# Altium PCB Bottom MEA (Inverted Microscope).PcbDoc
Units mm, origin at the board's own origin, x right, y up, seen from the top; angles counter-clockwise.
Board outline 50 x 50 mm, 2 copper layers (Top Signal, Ground Pour); 24 components, 81 nets, 231 pads, 118 vias.
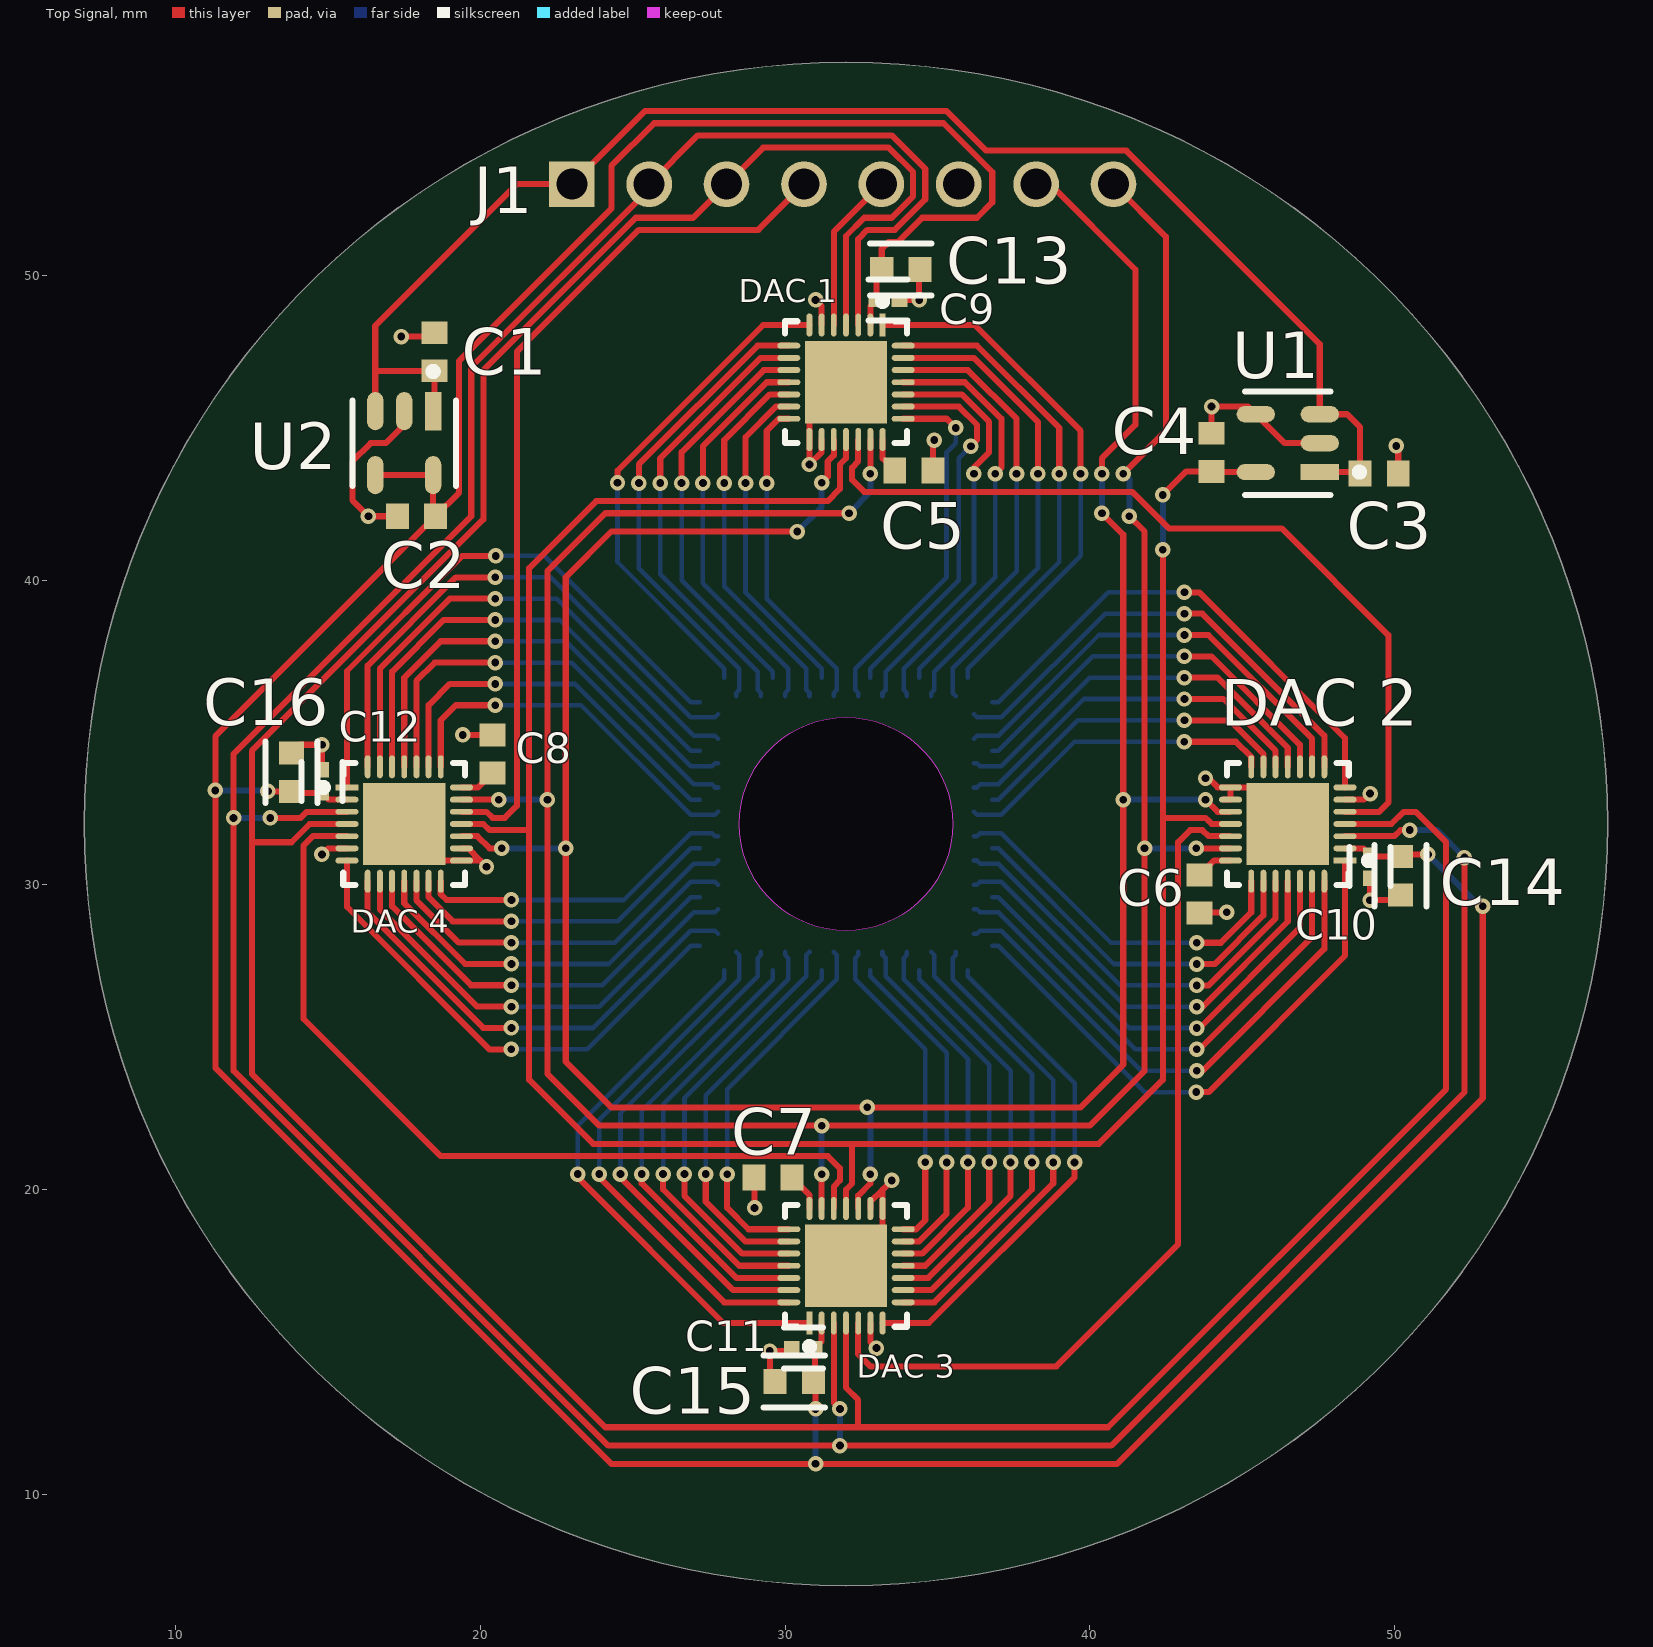
[diagram p0: Top Signal view]
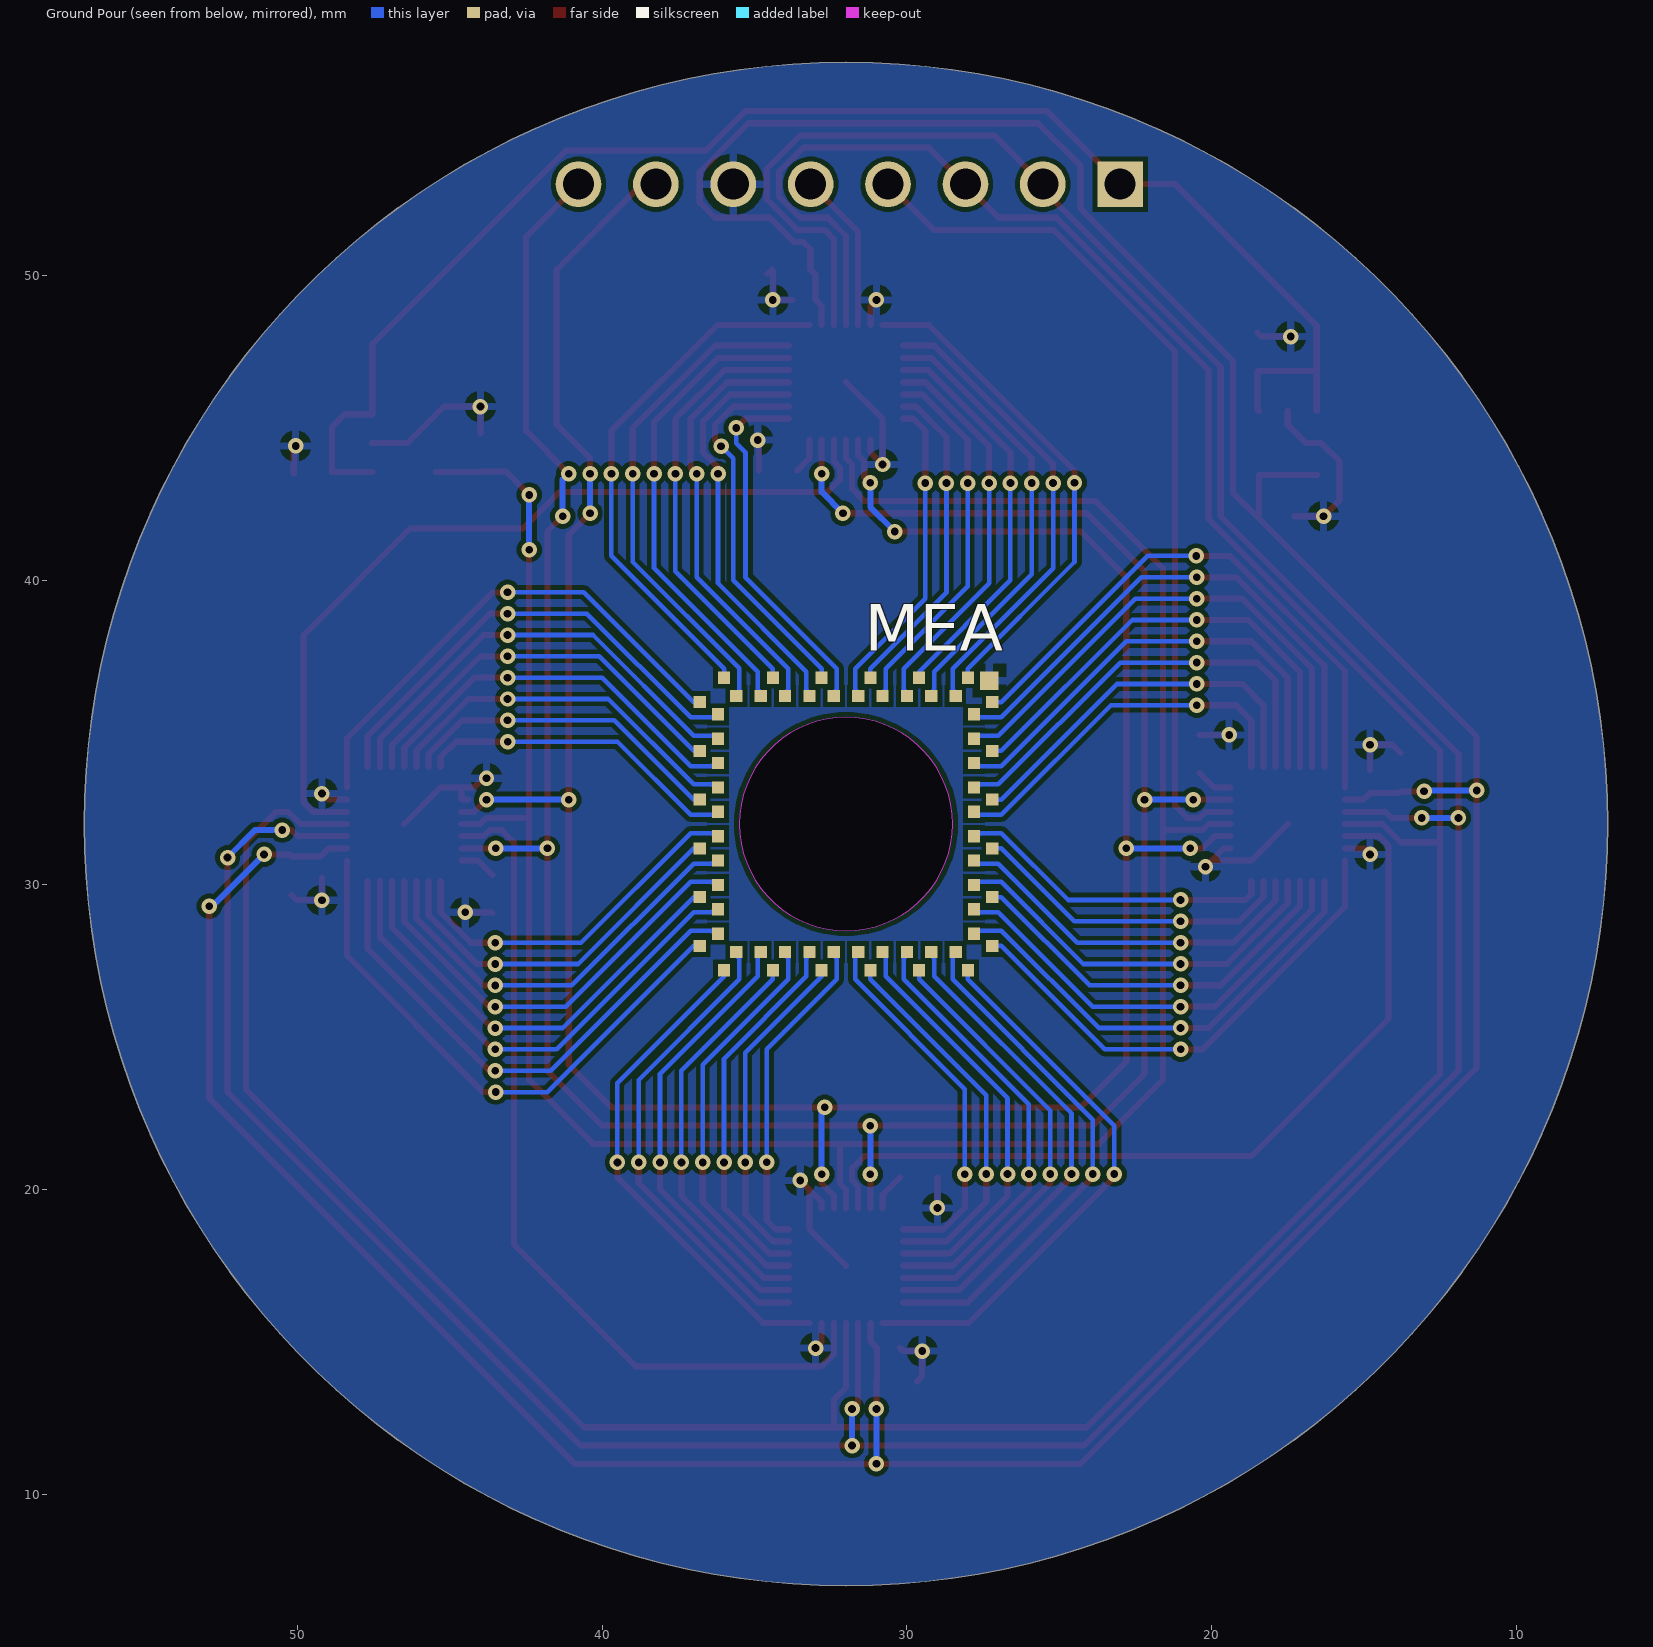
[diagram p1: Ground Pour view, seen from below]
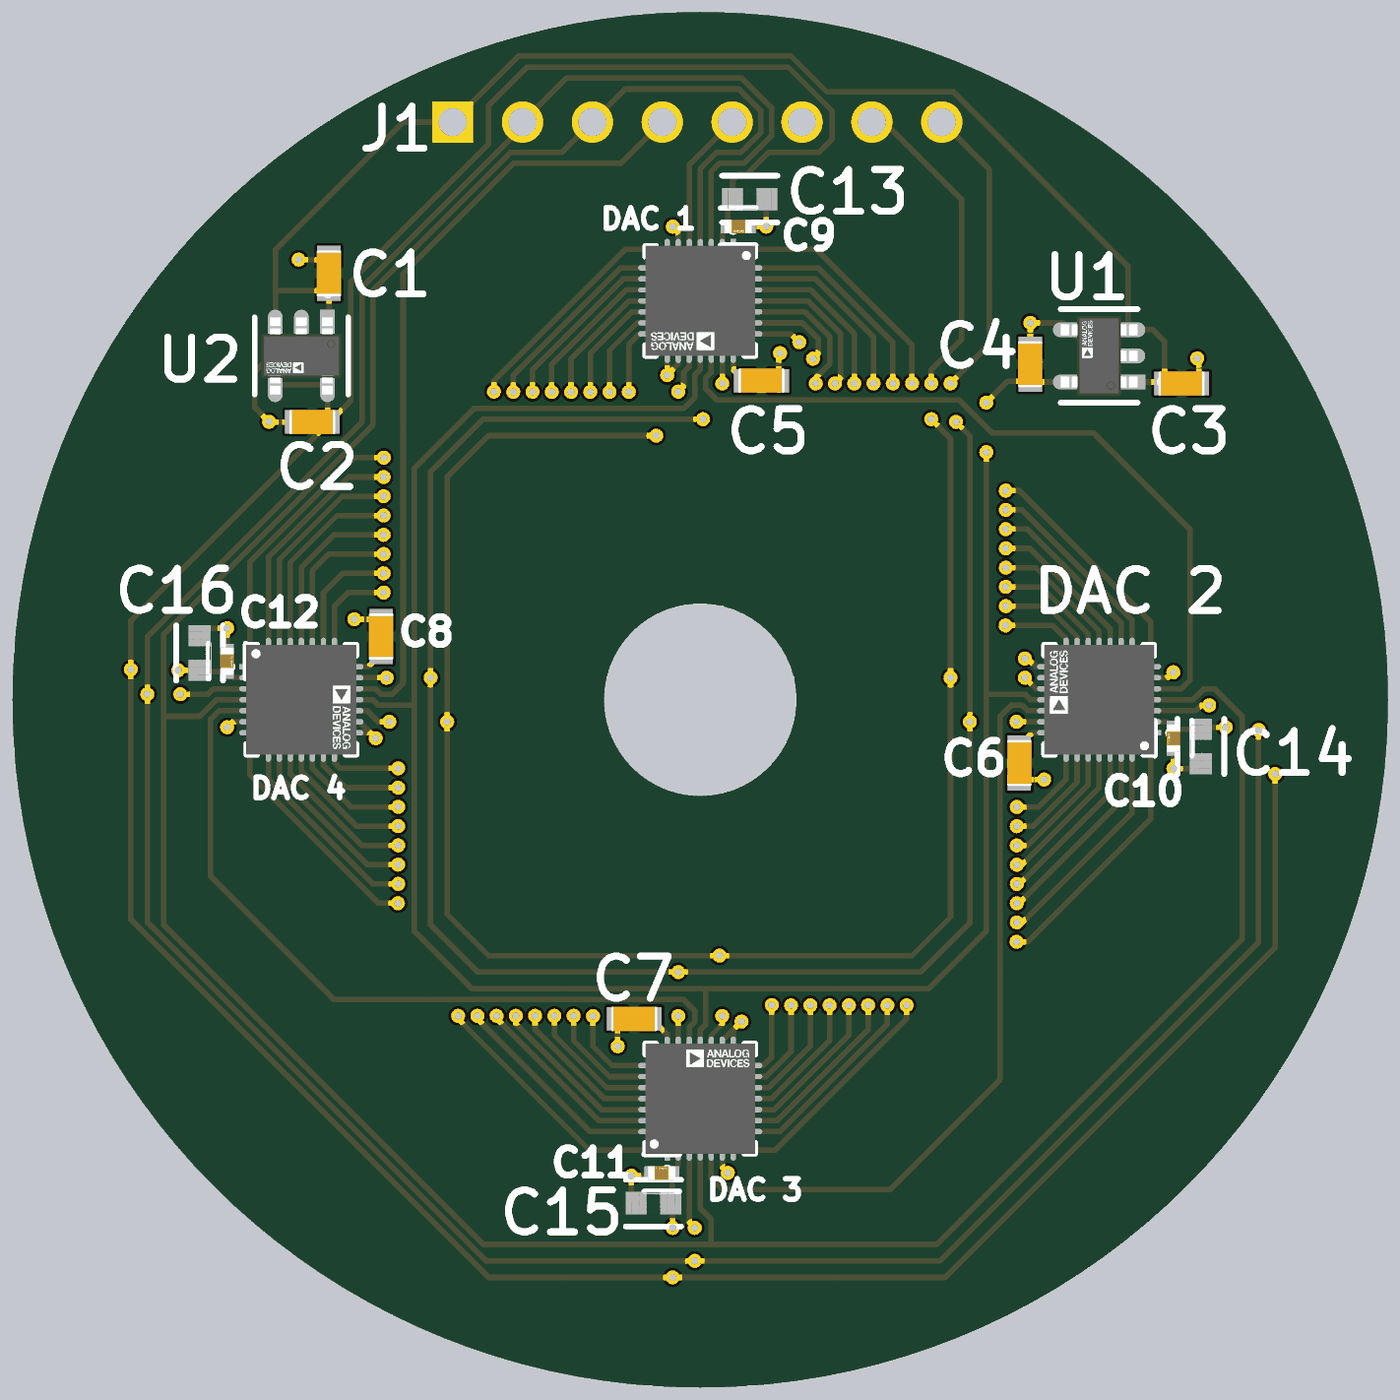
[diagram p2: 3D render of the assembled board from above, using the file's embedded part models]

## Layer stack, top to bottom
Top Solder: solder mask 0.0102, Solder Resist, Dk 3.5
Top Signal: signal copper 0.0356
Dielectric 1: dielectric 0.32, FR-4, Dk 4.8
Ground Pour: signal copper 0.0356
Bottom Solder: solder mask 0.0102, Solder Resist, Dk 3.5

## Board outline
32,7 cw(c32,32) 7,32 cw(c32,32) 32,57 cw(c32,32) 57,32 cw(c32,32)
cut-out: 32,28.5 cw(c32,32) 28.5,32 cw(c32,32) 32,35.5 cw(c32,32) 35.5,32 cw(c32,32)

## Design rules (kind name [scope] priority, off if disabled: settings)
Clearance [All] p1: gap=0.152 ignorepadtopadclearanceinfootprint=TRUE except(0: Arc-Hole Track-Hole SMDPad-Hole THPad-Hole Via-Hole Fill-Hole Poly-Hole Region-Hole Text-Hole)
PlaneConnect [All] p1: planeconnectstyle=Direct reliefexpansion=0.508 reliefentries=4 reliefconductorwidth=0.254 reliefairgap=0.254
PolygonConnect [All] p1: connectstyle=Relief reliefconductorwidth=0.254 reliefentries=4 polygonreliefangle="90 Angle" airgapwidth=0.254
RoutingVias [All] p1: holewidth=0.254 width=0.508 viastyle="Through Hole" minholewidth=0.254 minwidth=0.508 maxholewidth=0.254 maxwidth=0.508
SolderMaskExpansion [All] p1: expansion=0.102 istentingtop=FALSE
Width [All] p1: maxlimit=0.2 minlimit=0.152 preferedwidth=0.2 bottomlayer_prefwidth=0.152 minimp=50.000000 maximp=50.000000 favimp=50.000000
29 further rules are at their usual default settings.

## Components (designator, comment, footprint, x,y, rotation, side; value= is the part's Value field where it differs from the comment)
C1 "2.2 µF" CAPC1608X90X30LL10T20 18.5,47.5 r270 top
C2 "2.2 µF" CAPC1608X90X30LL10T20 17.9,42.1 r0 top
C3 "2.2 µF" CAPC1608X90X30LL10T20 49.5,43.5 r180 top locked
C4 "2.2 µF" CAPC1608X90X30LL10T20 44,44.2 r270 top
C5 "2.2 µF" CAPC1608X90X30LL10T20 34.225,43.6 r0 top locked
C6 "2.2 µF" CAPC1608X90X30LL10T20 43.6,29.7 r90 top locked
C7 "2.2 µF" CAPC1608X90X30LL10T20 29.6,20.4 r0 top locked
C8 "2.2 µF" CAPC1608X90X30LL10T20 20.4,34.3 r270 top
C9 "0.1 µF" FP-CL278-IPC_C 33.379,49.2 r0 top locked
C10 "0.1 µF" FP-CL278-IPC_C 49.2,30.6 r270 top locked
C11 "0.1 µF" FP-CL278-IPC_C 30.6,14.8 r180 top locked
C12 "0.1 µF" FP-CL278-IPC_C 14.8,33.4 r90 top locked
C13 "10 µF" FP-CL10-IPC_C 33.8,50.2 r0 top locked
C14 "10 µF" FP-CL10-IPC_C 50.2,30.3 r270 top locked
C15 "10 µF" FP-CL10-IPC_C 30.3,13.7 r180 top locked
C16 "10 µF" FP-CL10-IPC_C 13.8,33.7 r90 top locked
"DAC 1" "AD5674RBCPZ-1" FP-CP-28-9-IPC_C 32,46.5 r270 top locked
"DAC 2" "AD5674RBCPZ-1" FP-CP-28-9-IPC_C 46.5,32 r180 top locked
"DAC 3" "AD5674RBCPZ-1" FP-CP-28-9-IPC_C 32,17.5 r90 top locked
"DAC 4" "AD5674RBCPZ-1" FP-CP-28-9-IPC_C 17.5,32 r0 top locked
J1 "SPI Bus Connector" "SPI Bus Connector" 23,53 r90 top
MEA "64 Electrode Wafer" "64 Electrode Wafer Footprint" 27,27 r0 bottom locked
U1 "ADP160AUJZ-1.8-R7" FP-UJ-5-IPC_C 46.5,44.5 r180 top locked
U2 "ADP7118WAUJZ-3.3-R7" FP-UJ-5-IPC_C 17.5,44.5 r270 top locked

## Footprints (in the part's own frame and the unit in brackets; to place one, negate y for a bottom-side part, rotate by r counter-clockwise, add the part's x,y. Pads: shape width x height; smd on the part's side, far side on the other; paste and mask are expansions set on the pad)
"64 Electrode Wafer Footprint" [mm]
  rect 0.4x0.4 smd mask+0: 1(1,-9.8) 2(1.4,-9.2) 3(2.2,-9.2) 4(2.6,-9.8) 5(3,-9.2) 6(3.8,-9.2) 7(4.2,-9.8) 8(4.6,-9.2) 9(5.4,-9.2) 10(5.8,-9.8) 11(6.2,-9.2) 12(7,-9.2) 13(7.4,-9.8) 14(7.8,-9.2) 15(8.6,-9.2) 16(9,-9.8) 17(9.8,-9) 18(9.2,-8.6) 19(9.2,-7.8) 20(9.8,-7.4) 21(9.2,-7) 22(9.2,-6.2) 23(9.8,-5.8) 24(9.2,-5.4) 25(9.2,-4.6) 26(9.8,-4.2) 27(9.2,-3.8) 28(9.2,-3) 29(9.8,-2.6) 30(9.2,-2.2) 31(9.2,-1.4) 32(9.8,-1) 33(9,-0.2) 34(8.6,-0.8) 35(7.8,-0.8) 36(7.4,-0.2) 37(7,-0.8) 38(6.2,-0.8) 39(5.8,-0.2) 40(5.4,-0.8) 41(4.6,-0.8) 42(4.2,-0.2) 43(3.8,-0.8) 44(3,-0.8) 45(2.6,-0.2) 46(2.2,-0.8) 47(1.4,-0.8) 48(1,-0.2) 49(0.2,-1) 50(0.8,-1.4) 51(0.8,-2.2) 52(0.2,-2.6) 53(0.8,-3) 54(0.8,-3.8) 55(0.2,-4.2) 56(0.8,-4.6) 57(0.8,-5.4) 58(0.2,-5.8) 59(0.8,-6.2) 60(0.8,-7) 61(0.2,-7.4) 62(0.8,-7.8) 63(0.8,-8.6) 64(0.2,-9)
  rect 0.6x0.6 smd mask+0: 65(0.3,-9.7)
CAPC1608X90X30LL10T20 [mm] "Chip Capacitor, 2-Leads, Body 1.70x0.90mm, IPC High Density"
  rect 0.75x0.85 smd: 1(-0.625,0) 2(0.625,0)
  body extent -0.85,-0.45 0.85,0.45, height 0.9
FP-CL10-IPC_C [mm]
  rect 0.758x0.812 smd paste+0 mask+0: 1(-0.627,0) 2(0.627,0)
  silkscreen extent -1.01,-0.85 1.01,0.85, body extent -1.11,-0.55 1.11,0.55, height 0.25
FP-CL278-IPC_C [mm]
  rect 0.515x0.472 smd paste+0 mask+0: 1(-0.379,0) 2(0.379,0)
  silkscreen extent -0.64,-0.67 0.64,0.67, body extent -0.74,-0.38 0.74,0.38, height 0.25
FP-CP-28-9-IPC_C [mm]
  rect 0.756x0.192 smd paste+0 mask+0: 1(-1.878,1.2)
  rrect100% 0.756x0.192 smd paste+0 mask+0: 2(-1.878,0.8) 3(-1.878,0.4) 4(-1.878,0) 5(-1.878,-0.4) 6(-1.878,-0.8) 7(-1.878,-1.2) 15(1.878,-1.2) 16(1.878,-0.8) 17(1.878,-0.4) 18(1.878,0) 19(1.878,0.4) 20(1.878,0.8) 21(1.878,1.2)
  rrect100% 0.192x0.756 smd paste+0 mask+0: 8(-1.2,-1.878) 9(-0.8,-1.878) 10(-0.4,-1.878) 11(0,-1.878) 12(0.4,-1.878) 13(0.8,-1.878) 14(1.2,-1.878) 22(1.2,1.878) 23(0.8,1.878) 24(0.4,1.878) 25(0,1.878) 26(-0.4,1.878) 27(-0.8,1.878) 28(-1.2,1.878)
  rect 2.7x2.7 smd paste-1000 mask+0: 29(0,0)
  silkscreen extent -2.78,-2 2,2, body extent -2.36,-2.36 2.36,2.36, height 0.25
FP-UJ-5-IPC_C [mm]
  rect 1.254x0.532 smd paste+0 mask+0: 1(-1.05,0.95)
  rrect100% 1.254x0.532 smd paste+0 mask+0: 2(-1.05,0) 3(-1.05,-0.95) 4(1.05,-0.95) 5(1.05,0.95)
  silkscreen extent -2.48,-1.7 1.4,1.7, body extent -1.78,-1.55 1.78,1.55, height 0.25
"SPI Bus Connector" [mm]
  rect 1.5x1.5 hole 1.02 mask+0: 1(0,0)
  round 1.5 hole 1.02 mask+0: 2(0,-2.54) 3(0,-5.08) 4(0,-7.62) 5(0,-10.16) 6(0,-12.7) 7(0,-15.24) 8(0,-17.78)

## Part data
C1 C2 C3 C4 C5 C6 C7 C8: library part CMP-2000-06090-1, "Chip Capacitor, 2.2 uF, +/- 10%, 10 V, -55 to 85 degC, 0603 (1608 Metric), RoHS, Tape and Reel", Capacitance=4700000pF, Case Size/Dimension=0603, Dielectric=X5R, Manufacturer="Samsung Electro-Mechanics", Package Description="2-Pin Surface Mount Device, Body 1.60 x 0.80 mm", Rated Voltage=6.3V, Tolerance (%)=±10%, Datasheet URL=http://www.samsungsem.com/kr/support/product-search/mlcc/__icsFiles/afieldfile/2016/08/18/S_CL10A475KQ8NNNC.pdf, Datasheet Version=07/2016, Manufacturer URL=http://www.samsungsem.com/global/index.jsp, Mounting Technology=SurfaceMount, Package Reference=0603
C9 C10 C11 C12: library part CMP-13271-000728-1, "Cap Ceramic 100nF 25V X5R ±10% SMD 0402 +85°C Paper T/R", Capacitance=100nF, Case Code (Imperial)=0402, Case Code (Metric)=1005, Dielectric=X5R, Max Operating Temperature=85°C, Min Operating Temperature=-55°C, Package Quantity=1, Tolerance=10%, Voltage=25V, Case/Package=0402, Depth=0.5mm, Height=0.5mm, Lead Free="Lead Free", Length=1mm, Mount="Surface Mount", Packaging="Tape and Reel", Radiation Hardening=No, Thickness=0.022inch, Voltage Rating=25V, Voltage Rating (DC)=25V, Width=0.02inch
C13 C14 C15 C16: library part CMP-13271-001938-1, "Cap Ceramic 10uF 6.3V X5R ±20% Pad SMD 0603 +85°C T/R", Capacitance=10uF, Case Code (Imperial)=0603, Case Code (Metric)=1608, Dielectric=X5R, Max Operating Temperature=85°C, Min Operating Temperature=-55°C, Package Quantity=1, Tolerance=20%, Voltage=6.3V, Case/Package=0603, Contact Plating=Tin, Depth=0.8mm, Height=0.8mm, Length=1.6mm, Mount="Surface Mount", Packaging="Tape and Reel", Radiation Hardening=No, Thickness=0.035inch, Voltage Rating=6.3V, Width=0.031inch
"DAC 1" "DAC 2" "DAC 3" "DAC 4": library part CMP-09082-000013-1, "16-CH12-BITNANODAC+WITH2PPM/CREF", RoHS Compliant=Yes
J1: "8 pin connector for SPI interface and power from m", Part Number="SPI Bus Connector"
MEA: "64 channel transparent Microelectrode Array", Part Number="64 Electrode Wafer"
U1: library part CMP-09138-000088-1, "IC REG LINEAR 1.8V 150MA TSOT5", Case/Package=TSOT, Dropout Voltage=120mV, Max Input Voltage=5.5V, Max Operating Temperature=125°C, Max Output Current=150mA, Max Output Voltage=4.2V, Max Supply Current=42uA, Min Current Limit=220mA, Min Input Voltage=2.2V, Min Operating Temperature=-40°C, Min Output Voltage=1.2V, Nominal Output Voltage=1.8V, Output Voltage Accuracy=2%, Power Supply Rejection Ratio (PSRR)=60dB, Quiescent Current=0mA, Accuracy=2%, Contact Plating=Tin, Height=0.9mm, Lead Free="Contains Lead", Length=2.9mm, Mount="Surface Mount", Nominal Supply Current=42uA, Number of Outputs=1, Number of Pins=5, Number of Regulators=1, Operating Supply Current=42uA, Output Current=150mA, Output Type=Fixed, Output Voltage=1.8V, Packaging="Tape and Reel", Polarity=Positive, Radiation Hardening=No, RoHS Compliant=Yes, Series=-, Width=1.6mm
U2: library part CMP-09138-000103-1, "IC REG LINEAR 3.3V 200MA TSOT5"

## Via types
v1: diameter 0.508, hole 0.254, Top Signal to Ground Pour, 118 vias

## Nets (pads, with @x,y where several pads share a name; then routed paths per layer and width w, separated by ;. In a path a pad name is that pad's centre, name@x,y a point inside that pad or via, vN(x,y) a via of type N, cw(c..) or ccw(c..) an arc to the next point about the centre after c; other vN are vias at no path point)
GND: "DAC 1.6" "DAC 1.15" "DAC 1.16" "DAC 1.29" "DAC 2.6" "DAC 2.15" "DAC 2.16" "DAC 2.29" "DAC 3.6" "DAC 3.15" "DAC 3.16" "DAC 3.29" "DAC 4.6" "DAC 4.15" "DAC 4.16" "DAC 4.29" C1.1 C2.1 C3.1 C4.1 C5.2 C6.1 C7.1 C8.1 C9.2 C10.2 C11.2 C12.2 C13.2 C14.2 C15.2 C16.2 J1.6 MEA.65 U1.2 U1.4 U2.2 | length 44
  Top Signal w0.2: C16.2 14.073,34.6 v1(14.8,34.6) C12.2 ; v1(14.8,31) 15,31.2 15.622,31.2 ; C2.1 16.329,42.1 v1(16.326,42.103) 15.8,42.629 15.8,43.9 16.4,44.5 16.9,44.5 17.5,45.1 U2.2 ; v1(17.4,48) 18.375,48 C1.1 ; 17.5,32 18.7,30.8 19.378,30.8 20,30.8 ; 19.378,31.2 19.6,31.2 20,30.8 ; v1(19.425,34.925) C8.1 ; v1(20.2,30.6) 20,30.8 ; C7.1 29,20.375 v1(29,19.4) ; C15.2 29.5,13.873 v1(29.5,14.7) 30.121,14.7 C11.2 ; v1(31,49.2) 31.2,49 31.2,48.378 ; 31.2,44.622 31.2,44.2 v1(30.8,43.8) 30.8,44.622 30.8,45.3 32,46.5 ; 32,17.5 33.2,18.7 33.2,19.378 33.2,20 ; 32.8,15.622 32.8,15 v1(33,14.8) ; 32.8,19.378 32.8,19.6 33.2,20 ; v1(33.5,20.3) 33.2,20 ; C9.2 v1(34.4,49.2) 34.4,50.173 C13.2 C13.2@34.573,50.054 ; C5.2 34.85,44.55 v1(34.9,44.6) ; C6.1 43.625,29.1 v1(44.5,29.1) ; v1(43.8,33.5) 43.9,33.5 44.2,33.2 44.622,33.2 ; C4.1 v1(44,45.7) 45.2,45.7 U1.4 46.4,44.5 U1.2 ; 44.4,32.8 44.622,32.8 44.622,33.2 ; 46.5,32 45.3,33.2 44.622,33.2 ; 48.378,32.8 49,32.8 v1(49.2,33) ; C10.2 v1(49.2,29.5) 50.027,29.5 C14.2 ; v1(50.065,44.41) 50.125,44.349 C3.1
NetC1_2: C1.2 C3.2 J1.1 U1.1 U1.3 U2.1 U2.3 | length 49.8
  Top Signal w0.2: U2.3 16.55,46.95 ; U2.1 18.5,45.6 C1.2 16.625,46.875 16.55,46.95 ; U1.1 C3.2@48.825,43.55 ; C3.2@48.875,43.55 48.875,45.025 48.45,45.45 U1.3 47.55,47.75 41.2,54.1 36.6,54.1 35.3,55.4 25.4,55.4 J1.1 21.2,53 16.55,48.35 16.55,46.95
NetC2_2: "DAC 1.2" "DAC 2.2" "DAC 3.2" "DAC 4.2" C2.2 C9.1 C10.1 C11.1 C12.1 C13.1 C14.1 C15.1 C16.1 U2.4 U2.5 | length 132.7
  Top Signal w0.2: v1(13.027,33.073) C16.1 13.852,33.021 C12.1 15.021,32.8 15.622,32.8 ; U2.4 U2.5 18.45,42.175 C2.2 ; v1(31,12.8) 31,13.73 30.979,13.752 C11.1 31.2,15.021 31.2,15.622 ; 32.8,48.378 32.8,49 C9.1 33,50.027 C13.1 33.173,50.873 33.4,51.1 33.7,51.1 34.5,51.9 36.3,51.9 36.8,52.4 36.8,53.4 35.2,55 25.7,55 24.3,53.6 24.3,52.2 19.3,47.2 19.3,42.875 C2.2 ; 48.378,31.2 48.979,31.2 C10.1 49.252,30.927 C14.1 50.273,31 v1(51.1,31) ; v1(52.9,29.3) 52.9,23 40.9,11 v1(31,11) 24.3,11 11.3,24 v1(11.3,33.1) 11.3,34.875 C2.2
  Ground Pour w0.2: v1(11.3,33.1) 13,33.1 v1(13.027,33.073) ; v1(31,11) v1(31,12.8) ; v1(51.1,31) 52.8,29.3 v1(52.9,29.3)
NetC4_2: "DAC 1.18" "DAC 2.18" "DAC 3.18" "DAC 4.18" C4.2 U1.5 | length 81.7
  Top Signal w0.2: 19.378,32 20.1,32 20.3,31.8 21.6,31.8 ; 32,19.378 32,20 32.2,20.2 32.2,21.5 ; 32,44.622 32,44 31.8,43.8 31.8,43 31.4,42.6 23.8,42.6 21.6,40.4 21.6,31.8 ; v1(42.4,41) 42.4,32.2 ; v1(42.4,42.8) 43.175,43.575 C4.2 44.025,43.55 U1.5 ; 44.622,32 44,32 43.9,32.1 43.8,32.2 42.4,32.2 ; 21.6,31.8 21.6,23.6 23.7,21.5 32.2,21.5 ; 32.2,21.5 40.3,21.5 42.4,23.6 42.4,32.2
  Ground Pour w0.2: v1(42.4,41) v1(42.4,42.8)
NetC5_1: "DAC 1.21" C5.1 | length 1.2
  Top Signal w0.2: 33.2,44.622 33.2,44 C5.1
NetC6_2: "DAC 2.21" C6.2 | length 1.2
  Top Signal w0.2: C6.2 44.075,30.8 44.622,30.8
NetC7_2: "DAC 3.21" C7.2 | length 1.3
  Top Signal w0.2: C7.2 30.8,19.825 30.8,19.378
NetC8_2: "DAC 4.21" C8.2 | length 1.2
  Top Signal w0.2: 19.378,33.2 19.925,33.2 C8.2
"NetDAC 1_1": "DAC 1.1" MEA.16 | length 17.6
  Top Signal w0.2: 33.2,48.378 36.222,48.378 39.7,44.9 v1(39.7,43.5)
  Ground Pour w0.152: MEA.16 36,37.1 39.7,40.8 v1(39.7,43.5)
"NetDAC 1_3": "DAC 1.3" "DAC 2.3" "DAC 3.3" "DAC 4.3" J1.2 | length 121.8
  Top Signal w0.2: v1(13.1,32.2) 14.1,32.2 14.3,32.4 15.622,32.4 ; 31.6,15.622 31.6,13 v1(31.8,12.8) ; 32.4,48.378 32.4,51.2 32.7,51.5 33.6,51.5 34.6,52.5 34.6,53.5 33.5,54.6 27.14,54.6 J1.2 25.54,52.84 19.7,47 19.7,42.1 11.9,34.3 v1(11.9,32.2) 11.9,23.9 24.2,11.6 v1(31.8,11.6) 40.7,11.6 52.3,23.2 v1(52.3,30.9) ; 48.378,31.6 50,31.6 50.2,31.8 v1(50.5,31.8)
  Ground Pour w0.2: v1(11.9,32.2) v1(13.1,32.2) ; v1(31.8,11.6) v1(31.8,12.8) ; v1(50.5,31.8) 51.4,31.8 v1(52.3,30.9)
"NetDAC 1_4": "DAC 1.4" "DAC 2.4" "DAC 3.4" "DAC 4.4" J1.3 | length 117.7
  Top Signal w0.2: 15.622,32 14.4,32 13.8,31.4 12.5,31.4 ; 32,15.622 32,13.5 32.4,13.1 32.4,12.2 ; 32,48.378 32,51.3 32.6,51.9 33.5,51.9 34.2,52.6 34.2,53.4 33.4,54.2 29.28,54.2 J1.3 26.98,51.9 25.1,51.9 20.1,46.9 20.1,42 12.5,34.4 12.5,31.4 ; 48.378,32 49.9,32 50.3,32.4 50.7,32.4 51.7,31.4 51.7,23.3 40.6,12.2 32.4,12.2 ; 12.5,31.4 12.5,23.8 24.1,12.2 32.4,12.2
"NetDAC 1_5": "DAC 1.5" J1.5 | length 5.3
  Top Signal w0.2: 31.6,48.378 31.6,51.44 J1.5
"NetDAC 1_7": "DAC 1.7" MEA.1 | length 16.5
  Top Signal w0.2: v1(24.5,43.2) 24.5,43.6 29.278,48.378 30.8,48.378
  Ground Pour w0.152: v1(24.5,43.2) 24.5,40.6 28,37.1 MEA.1
"NetDAC 1_8": "DAC 1.8" MEA.2 | length 15.5
  Top Signal w0.2: v1(25.203,43.191) 25.203,43.803 29.1,47.7 30.122,47.7
  Ground Pour w0.152: v1(25.203,43.191) 25.203,40.397 28.5,37.1 28.5,36.4 28.4,36.3 MEA.2
"NetDAC 1_9": "DAC 1.9" MEA.3 | length 14.8
  Top Signal w0.2: v1(25.903,43.191) 25.903,44.003 29.2,47.3 30.122,47.3
  Ground Pour w0.152: v1(25.903,43.191) 25.903,40.197 29.1,37 29.1,36.4 29.2,36.3 MEA.3
"NetDAC 1_10": "DAC 1.10" MEA.4 | length 13.3
  Top Signal w0.2: v1(26.603,43.191) 26.603,44.203 29.3,46.9 30.122,46.9
  Ground Pour w0.152: v1(26.603,43.191) 26.603,39.997 29.6,37 MEA.4
"NetDAC 1_11": "DAC 1.11" MEA.5 | length 13.1
  Top Signal w0.2: v1(27.303,43.191) 27.303,44.403 29.4,46.5 30.122,46.5
  Ground Pour w0.152: v1(27.303,43.191) 27.303,39.897 30.1,37.1 30.1,36.4 30,36.3 MEA.5
"NetDAC 1_12": "DAC 1.12" MEA.6 | length 12.3
  Top Signal w0.2: v1(28.003,43.191) 28.003,44.603 29.5,46.1 30.122,46.1
  Ground Pour w0.152: v1(28.003,43.191) 28.003,39.797 30.7,37.1 30.7,36.4 30.8,36.3 MEA.6
"NetDAC 1_13": "DAC 1.13" MEA.7 | length 10.8
  Top Signal w0.2: v1(28.703,43.191) 28.703,44.703 29.7,45.7 30.122,45.7
  Ground Pour w0.152: v1(28.703,43.191) 28.703,39.597 31.2,37.1 MEA.7
"NetDAC 1_14": "DAC 1.14" MEA.8 | length 10.6
  Top Signal w0.2: v1@29.4,43.194 29.4,44.9 29.8,45.3 30.122,45.3
  Ground Pour w0.152: v1(29.403,43.191) 29.403,39.397 31.7,37.1 31.7,36.4 31.6,36.3 MEA.8
"NetDAC 1_17": "DAC 1.17" "DAC 2.17" "DAC 3.17" "DAC 4.17" J1.7 | length 89.4
  Top Signal w0.2: 19.378,31.6 19.9,31.6 20.3,31.2 v1(20.7,31.2) ; v1(30.4,41.6) 24.3,41.6 22.8,40.1 v1(22.8,31.2) 22.8,24.2 24.3,22.7 v1(32.7,22.7) 39.7,22.7 41.1,24.1 v1(41.1,32.8) 41.1,41.5 v1(40.4,42.2) ; v1(31.2,43.2) 31.4,43.4 31.4,43.9 31.6,44.1 31.6,44.622 ; 32.4,19.378 32.4,19.8 32.8,20.2 v1(32.8,20.5) ; J1.7 38.7,53 41.5,50.2 41.5,45.1 40.4,44 v1(40.4,43.5) ; v1(43.8,32.8) 44.2,32.4 44.622,32.4
  Ground Pour w0.2: v1(20.7,31.2) v1(22.8,31.2) ; v1(30.4,41.6) 31.2,42.4 v1(31.2,43.2) ; v1(32.7,22.7) 32.8,22.6 v1(32.8,20.5) ; v1(40.4,42.2) v1(40.4,43.5) ; v1(41.1,32.8) v1(43.8,32.8) v1@43.7,32.7
"NetDAC 1_19": "DAC 1.19" "DAC 2.5" | length 28.2
  Top Signal w0.2: 32.4,44.622 32.4,43.9 32.2,43.7 32.2,43.3 32.6,42.9 41.4,42.9 42.6,41.7 46.3,41.7 49.8,38.2 49.8,32.7 49.5,32.4 48.378,32.4
"NetDAC 1_20": "DAC 1.20" "DAC 2.20" "DAC 3.20" "DAC 4.20" J1.8 | length 90
  Top Signal w0.2: 19.378,32.8 v1(20.6,32.8) ; 31.2,19.378 v1(31.2,20.5) ; v1(32.1,42.2) 24.1,42.2 22.2,40.3 v1(22.2,32.8) 22.2,23.8 23.9,22.1 v1(31.2,22.1) 40,22.1 41.8,23.9 v1(41.8,31.2) 41.8,41.6 v1(41.3,42.1) ; v1(32.8,43.5) 32.8,44.622 ; J1.8 42.5,51.28 42.5,44.9 v1(41.1,43.5) ; v1(43.5,31.2) 44.622,31.2
  Ground Pour w0.2: v1(20.6,32.8) v1(22.2,32.8) ; v1(31.2,20.5) v1(31.2,22.1) ; v1(32.1,42.2) 32.8,42.9 v1(32.8,43.5) ; v1(41.1,43.5) 41.3,43.3 v1(41.3,42.1) ; v1(41.8,31.2) v1(43.5,31.2)
"NetDAC 1_22": "DAC 1.22" MEA.9 | length 12.2
  Top Signal w0.2: 33.878,45.3 35.3,45.3 v1(35.6,45)
  Ground Pour w0.152: MEA.9 32.4,36.3 32.3,36.4 32.3,37.1 35.3,40.1 35.3,44.2 35.6,44.5 v1(35.6,45) v1@35.5,44.9
"NetDAC 1_23": "DAC 1.23" MEA.10 | length 12.4
  Top Signal w0.2: 33.878,45.7 35.7,45.7 36.3,45.1 36.3,44.6 v1(36.1,44.4)
  Ground Pour w0.152: MEA.10 32.8,37.1 35.7,40 35.7,44 v1(36.1,44.4)
"NetDAC 1_24": "DAC 1.24" MEA.11 | length 13.6
  Top Signal w0.2: 33.878,46.1 35.8,46.1 36.7,45.2 36.7,44.2 36.2,43.7 v1(36.2,43.5)
  Ground Pour w0.152: MEA.11 33.2,36.3 33.3,36.4 33.3,37 36.2,39.9 v1(36.2,43.5)
"NetDAC 1_25": "DAC 1.25" MEA.12 | length 14.2
  Top Signal w0.2: 33.878,46.5 35.9,46.5 37.1,45.3 37.1,43.7 v1(36.9,43.5)
  Ground Pour w0.152: MEA.12 34,36.3 33.9,36.4 33.9,37.1 36.9,40.1 v1(36.9,43.5)
"NetDAC 1_26": "DAC 1.26" MEA.13 | length 14.2
  Top Signal w0.2: 33.878,46.9 36,46.9 37.6,45.3 v1(37.6,43.5)
  Ground Pour w0.152: MEA.13 34.4,37.1 37.6,40.3 v1(37.6,43.5)
"NetDAC 1_27": "DAC 1.27" MEA.14 | length 15.7
  Top Signal w0.2: 33.878,47.3 36.2,47.3 38.3,45.2 v1(38.3,43.5)
  Ground Pour w0.152: MEA.14 34.8,36.3 34.9,36.4 34.9,37 38.3,40.4 v1(38.3,43.5)
"NetDAC 1_28": "DAC 1.28" MEA.15 | length 16.5
  Top Signal w0.2: 33.878,47.7 36.3,47.7 39,45 v1(39,43.5)
  Ground Pour w0.152: MEA.15 35.509,36.291 35.509,37.109 39,40.6 v1(39,43.5)
"NetDAC 2_1": "DAC 2.1" MEA.32 | length 18.5
  Top Signal w0.2: v1(43.5,23.2) 43.9,23.2 48.378,27.678 48.378,30.8
  Ground Pour w0.152: MEA.32 37,28 41.8,23.2 v1(43.5,23.2)
"NetDAC 2_7": "DAC 2.7" MEA.17 | length 16.7
  Top Signal w0.2: v1(43.109,39.603) 43.597,39.603 48.378,34.822 48.378,33.2
  Ground Pour w0.152: MEA.17 37,36 40.603,39.603 v1(43.109,39.603)
"NetDAC 2_8": "DAC 2.8" MEA.18 | length 15.6
  Top Signal w0.2: v1(43.109,38.903) 43.697,38.903 47.7,34.9 47.7,33.878
  Ground Pour w0.152: MEA.18 36.3,35.5 37.1,35.5 40.503,38.903 v1(43.109,38.903)
"NetDAC 2_9": "DAC 2.9" MEA.19 | length 14.8
  Top Signal w0.2: v1(43.109,38.203) 43.897,38.203 47.3,34.8 47.3,33.878
  Ground Pour w0.152: MEA.19 36.3,34.9 37,34.9 40.303,38.203 v1(43.109,38.203)
"NetDAC 2_10": "DAC 2.10" MEA.20 | length 13.3
  Top Signal w0.2: v1(43.109,37.503) 43.997,37.503 46.9,34.6 46.9,33.878
  Ground Pour w0.152: MEA.20 37,34.4 40.103,37.503 v1(43.109,37.503)
"NetDAC 2_11": "DAC 2.11" MEA.21 | length 13.1
  Top Signal w0.2: v1(43.109,36.803) 44.197,36.803 46.5,34.5 46.5,33.878
  Ground Pour w0.152: MEA.21 36.3,34 36.4,33.9 37.1,33.9 40.003,36.803 v1(43.109,36.803)
"NetDAC 2_12": "DAC 2.12" MEA.22 | length 12.3
  Top Signal w0.2: v1(43.109,36.103) 44.397,36.103 46.1,34.4 46.1,33.878
  Ground Pour w0.152: MEA.22 36.3,33.2 36.4,33.3 37,33.3 39.803,36.103 v1(43.109,36.103)
"NetDAC 2_13": "DAC 2.13" MEA.23 | length 10.9
  Top Signal w0.2: v1@43.112,35.4 44.6,35.4 45.7,34.3 45.7,33.878
  Ground Pour w0.152: MEA.23 37,32.8 39.603,35.403 v1(43.109,35.403)
"NetDAC 2_14": "DAC 2.14" MEA.24 | length 10.7
  Top Signal w0.2: v1(43.1,34.7) 44.8,34.7 45.3,34.2 45.3,33.878
  Ground Pour w0.152: MEA.24 36.3,32.3 37.1,32.3 39.5,34.7 v1(43.1,34.7)
"NetDAC 2_19": "DAC 2.19" "DAC 3.5" | length 28.5
  Top Signal w0.2: 32.4,15.622 32.4,14.6 32.8,14.2 38.9,14.2 42.9,18.2 42.9,31.4 43.3,31.8 43.7,31.8 43.9,31.6 44.622,31.6
"NetDAC 2_22": "DAC 2.22" MEA.25 | length 12.1
  Top Signal w0.2: v1(43.509,28.103) 44.303,28.103 45.3,29.1 45.3,30.122
  Ground Pour w0.152: MEA.25 36.3,31.6 36.4,31.7 37.1,31.7 40.697,28.103 v1(43.509,28.103)
"NetDAC 2_23": "DAC 2.23" MEA.26 | length 12.3
  Top Signal w0.2: v1(43.509,27.403) 44.103,27.403 45.7,29 45.7,30.122
  Ground Pour w0.152: MEA.26 37,31.2 40.797,27.403 v1(43.509,27.403)
"NetDAC 2_24": "DAC 2.24" MEA.27 | length 13.7
  Top Signal w0.2: v1(43.509,26.703) 43.903,26.703 46.1,28.9 46.1,30.122
  Ground Pour w0.152: MEA.27 36.3,30.8 36.4,30.7 37,30.7 40.997,26.703 v1(43.509,26.703)
"NetDAC 2_25": "DAC 2.25" MEA.28 | length 14.5
  Top Signal w0.2: v1(43.509,26.003) 43.703,26.003 46.5,28.8 46.5,30.122
  Ground Pour w0.152: MEA.28 36.3,30 36.4,30.1 37.1,30.1 41.197,26.003 v1(43.509,26.003)
"NetDAC 2_26": "DAC 2.26" MEA.29 | length 14.8
  Top Signal w0.2: v1(43.509,25.303) 43.603,25.303 46.9,28.6 46.9,30.122
  Ground Pour w0.152: MEA.29 37,29.6 41.297,25.303 v1(43.509,25.303)
"NetDAC 2_27": "DAC 2.27" MEA.30 | length 16.4
  Top Signal w0.2: v1(43.509,24.603) 43.603,24.603 47.3,28.3 47.3,30.122
  Ground Pour w0.152: MEA.30 36.3,29.2 36.4,29.1 37,29.1 41.497,24.603 v1(43.509,24.603)
"NetDAC 2_28": "DAC 2.28" MEA.31 | length 17.3
  Top Signal w0.2: v1(43.509,23.903) 43.703,23.903 47.7,27.9 47.7,30.122
  Ground Pour w0.152: MEA.31 36.3,28.4 36.4,28.5 37.1,28.5 41.697,23.903 v1(43.509,23.903)
"NetDAC 3_1": "DAC 3.1" MEA.48 | length 18.4
  Top Signal w0.2: v1(23.197,20.509) 23.197,20.403 27.978,15.622 30.8,15.622
  Ground Pour w0.152: v1(23.197,20.509) 23.197,22.097 28,26.9 MEA.48
"NetDAC 3_7": "DAC 3.7" MEA.33 | length 16.5
  Top Signal w0.2: 33.2,15.622 34.722,15.622 39.503,20.403 v1(39.503,20.891)
  Ground Pour w0.152: MEA.33 36,27 39.503,23.497 v1(39.503,20.891)
"NetDAC 3_8": "DAC 3.8" MEA.34 | length 15.5
  Top Signal w0.2: 33.878,16.3 34.9,16.3 38.803,20.203 v1(38.803,20.891)
  Ground Pour w0.152: MEA.34 35.6,27.7 35.5,27.6 35.5,26.9 38.803,23.597 v1(38.803,20.891)
"NetDAC 3_9": "DAC 3.9" MEA.35 | length 14.8
  Top Signal w0.2: 33.878,16.7 34.8,16.7 38.103,20.003 v1(38.103,20.891)
  Ground Pour w0.152: MEA.35 34.9,27.7 34.9,27 38.103,23.797 v1(38.103,20.891)
"NetDAC 3_10": "DAC 3.10" MEA.36 | length 13.3
  Top Signal w0.2: 33.878,17.1 34.7,17.1 37.403,19.803 v1(37.403,20.891)
  Ground Pour w0.152: MEA.36 34.4,26.9 37.403,23.897 v1(37.403,20.891)
"NetDAC 3_11": "DAC 3.11" MEA.37 | length 13.1
  Top Signal w0.2: 33.878,17.5 34.6,17.5 36.703,19.603 v1(36.703,20.891)
  Ground Pour w0.152: MEA.37 34,27.7 33.9,27.6 33.9,26.9 36.703,24.097 v1(36.703,20.891)
"NetDAC 3_12": "DAC 3.12" MEA.38 | length 12.3
  Top Signal w0.2: 33.878,17.9 34.5,17.9 36.003,19.403 v1(36.003,20.891)
  Ground Pour w0.152: MEA.38 33.2,27.7 33.3,27.6 33.3,27 36.003,24.297 v1(36.003,20.891)
"NetDAC 3_13": "DAC 3.13" MEA.39 | length 10.8
  Top Signal w0.2: 33.878,18.3 34.4,18.3 35.303,19.203 v1(35.303,20.891)
  Ground Pour w0.152: MEA.39 32.8,27 35.303,24.497 v1(35.303,20.891)
"NetDAC 3_14": "DAC 3.14" MEA.40 | length 10.6
  Top Signal w0.2: 33.878,18.7 34.3,18.7 34.6,19 v1(34.6,20.9)
  Ground Pour w0.152: MEA.40 32.4,27.7 32.3,27.6 32.3,26.9 34.6,24.6 v1(34.6,20.9)
"NetDAC 3_19": "DAC 3.19" "DAC 4.5" | length 28.3
  Top Signal w0.2: 15.622,31.6 14.5,31.6 14.2,31.3 14.2,25.6 18.7,21.1 31.4,21.1 31.8,20.7 31.8,20.3 31.6,20.1 31.6,19.378
"NetDAC 3_22": "DAC 3.22" MEA.41 | length 12.2
  Top Signal w0.2: v1(28.1,20.5) 28.1,19.4 28.8,18.7 30.122,18.7
  Ground Pour w0.152: v1(28.1,20.5) 28.1,23.3 31.7,26.9 31.7,27.7 MEA.41
"NetDAC 3_23": "DAC 3.23" MEA.42 | length 12.4
  Top Signal w0.2: v1(27.397,20.509) 27.397,19.603 28.7,18.3 30.122,18.3
  Ground Pour w0.152: v1(27.397,20.509) 27.397,23.097 31.2,26.9 MEA.42
"NetDAC 3_24": "DAC 3.24" MEA.43 | length 13.9
  Top Signal w0.2: v1(26.697,20.509) 26.697,19.803 28.6,17.9 30.122,17.9
  Ground Pour w0.152: v1(26.697,20.509) 26.697,22.997 30.7,27 30.7,27.7 MEA.43
"NetDAC 3_25": "DAC 3.25" MEA.44 | length 14.7
  Top Signal w0.2: v1(25.997,20.509) 25.997,20.003 28.5,17.5 30.122,17.5
  Ground Pour w0.152: v1(25.997,20.509) 25.997,22.797 30.1,26.9 30.1,27.6 30,27.7 MEA.44
"NetDAC 3_26": "DAC 3.26" MEA.45 | length 14.9
  Top Signal w0.2: v1(25.297,20.509) 25.297,20.203 28.4,17.1 30.122,17.1
  Ground Pour w0.152: v1(25.297,20.509) 25.297,22.597 29.6,26.9 MEA.45
"NetDAC 3_27": "DAC 3.27" MEA.46 | length 16.4
  Top Signal w0.2: v1(24.597,20.509) 24.597,20.403 28.3,16.7 30.122,16.7
  Ground Pour w0.152: v1(24.597,20.509) 24.597,22.497 29.1,27 29.1,27.6 29.2,27.7 MEA.46
"NetDAC 3_28": "DAC 3.28" MEA.47 | length 17.3
  Top Signal w0.2: v1(23.897,20.509) 23.897,20.403 28,16.3 30.122,16.3
  Ground Pour w0.152: v1(23.897,20.509) 23.897,22.297 28.5,26.9 28.5,27.7 MEA.47
"NetDAC 4_1": "DAC 4.1" MEA.64 | length 19
  Top Signal w0.2: 15.622,33.2 15.622,37.022 19.4,40.8 v1(20.5,40.8)
  Ground Pour w0.152: v1(20.5,40.8) 22.1,40.8 26.9,36 MEA.64
"NetDAC 4_7": "DAC 4.7" MEA.49 | length 16.4
  Top Signal w0.2: 15.622,30.8 15.622,29.278 20.297,24.603 v1(21.009,24.603)
  Ground Pour w0.152: v1(21.009,24.603) 23.503,24.603 26.9,28 MEA.49
"NetDAC 4_8": "DAC 4.8" MEA.50 | length 15.5
  Top Signal w0.2: 16.3,30.122 16.3,29.1 20.094,25.306 v1(21.019,25.306)
  Ground Pour w0.152: v1(21.019,25.306) 23.706,25.306 26.9,28.5 27.7,28.5 MEA.50
"NetDAC 4_9": "DAC 4.9" MEA.51 | length 14.7
  Top Signal w0.2: 16.7,30.122 16.7,29.2 19.894,26.006 v1(21.019,26.006)
  Ground Pour w0.152: v1(21.019,26.006) 23.906,26.006 27,29.1 27.7,29.1 MEA.51
"NetDAC 4_10": "DAC 4.10" MEA.52 | length 13.2
  Top Signal w0.2: 17.1,30.122 17.1,29.3 19.694,26.706 v1(21.019,26.706)
  Ground Pour w0.152: v1(21.019,26.706) 24.006,26.706 26.9,29.6 MEA.52
"NetDAC 4_11": "DAC 4.11" MEA.53 | length 13
  Top Signal w0.2: 17.5,30.122 17.5,29.4 19.494,27.406 v1(21.019,27.406)
  Ground Pour w0.152: v1(21.019,27.406) 24.206,27.406 26.9,30.1 27.7,30.1 MEA.53
"NetDAC 4_12": "DAC 4.12" MEA.54 | length 12.2
  Top Signal w0.2: 17.9,30.122 17.9,29.5 19.294,28.106 v1(21.019,28.106)
  Ground Pour w0.152: v1(21.019,28.106) 24.406,28.106 27,30.7 27.7,30.7 MEA.54
"NetDAC 4_13": "DAC 4.13" MEA.55 | length 10.7
  Top Signal w0.2: 18.3,30.122 18.3,29.6 19.094,28.806 v1(21.019,28.806)
  Ground Pour w0.152: v1(21.019,28.806) 24.506,28.806 26.9,31.2 MEA.55
"NetDAC 4_14": "DAC 4.14" MEA.56 | length 10.6
  Top Signal w0.2: 18.7,30.122 18.7,29.7 18.894,29.506 v1(21.019,29.506)
  Ground Pour w0.152: v1(21.019,29.506) 24.706,29.506 26.9,31.7 27.6,31.7 27.7,31.6 MEA.56
"NetDAC 4_19": "DAC 4.19" J1.4 | length 28.7
  Top Signal w0.2: 19.378,32.4 20.2,32.4 20.4,32.2 20.8,32.2 21.2,32.6 21.2,47.5 25.2,51.5 29.12,51.5 J1.4
"NetDAC 4_22": "DAC 4.22" MEA.57 | length 12.4
  Top Signal w0.2: 18.7,33.878 18.7,35.4 19.197,35.897 v1(20.491,35.897)
  Ground Pour w0.152: v1(20.491,35.897) 23.303,35.897 26.9,32.3 27.7,32.3 MEA.57
  Ground Pour w0.2: v1@20.491,35.809 v1(20.491,35.897)
"NetDAC 4_23": "DAC 4.23" MEA.58 | length 12.8
  Top Signal w0.2: 18.3,33.878 18.3,35.9 18.997,36.597 v1(20.491,36.597)
  Ground Pour w0.152: v1(20.491,36.597) 23.103,36.597 26.9,32.8 MEA.58
"NetDAC 4_24": "DAC 4.24" MEA.59 | length 14.7
  Top Signal w0.2: 17.9,33.878 17.9,36.7 18.497,37.297 v1(20.491,37.297)
  Ground Pour w0.152: v1(20.491,37.297) 23.003,37.297 27,33.3 27.6,33.3 27.7,33.2 MEA.59
"NetDAC 4_25": "DAC 4.25" MEA.60 | length 15.5
  Top Signal w0.2: 17.5,33.878 17.5,36.8 18.697,37.997 v1(20.491,37.997)
  Ground Pour w0.152: v1(20.491,37.997) 22.803,37.997 26.9,33.9 27.6,33.9 27.7,34 MEA.60
"NetDAC 4_26": "DAC 4.26" MEA.61 | length 15.7
  Top Signal w0.2: 17.1,33.878 17.1,37 18.797,38.697 v1(20.491,38.697)
  Ground Pour w0.152: v1(20.491,38.697) 22.603,38.697 26.9,34.4 MEA.61
  Ground Pour w0.2: v1(20.491,38.697) v1@20.494,38.7
"NetDAC 4_27": "DAC 4.27" MEA.62 | length 17.2
  Top Signal w0.2: 16.7,33.878 16.7,37.1 18.997,39.397 v1(20.491,39.397)
  Ground Pour w0.152: v1(20.491,39.397) 22.503,39.397 27,34.9 27.7,34.9 MEA.62
"NetDAC 4_28": "DAC 4.28" MEA.63 | length 18
  Top Signal w0.2: 16.3,33.878 16.3,37.2 19.197,40.097 v1(20.491,40.097)
  Ground Pour w0.152: v1(20.491,40.097) 22.303,40.097 26.9,35.5 27.7,35.5 MEA.63

## Polygon pours and split planes (outlines as drawn)
GND on Ground Pour "GND_L02_P000" (solid, pour order 0): 32,7 cw(c32,32) 7,32 cw(c32,32) 32,57 cw(c32,32) 57,32 cw(c32,32)